# Altium PCB RF-car.PcbDoc
Units mm, origin at the board's own origin, x right, y up, seen from the top; angles counter-clockwise.
Board outline 151 x 86.38 mm, 2 copper layers (Top Layer, Bottom Layer); 71 components, 69 nets, 188 pads, 0 vias.
Unrouted connection lines stored in the file: 9.
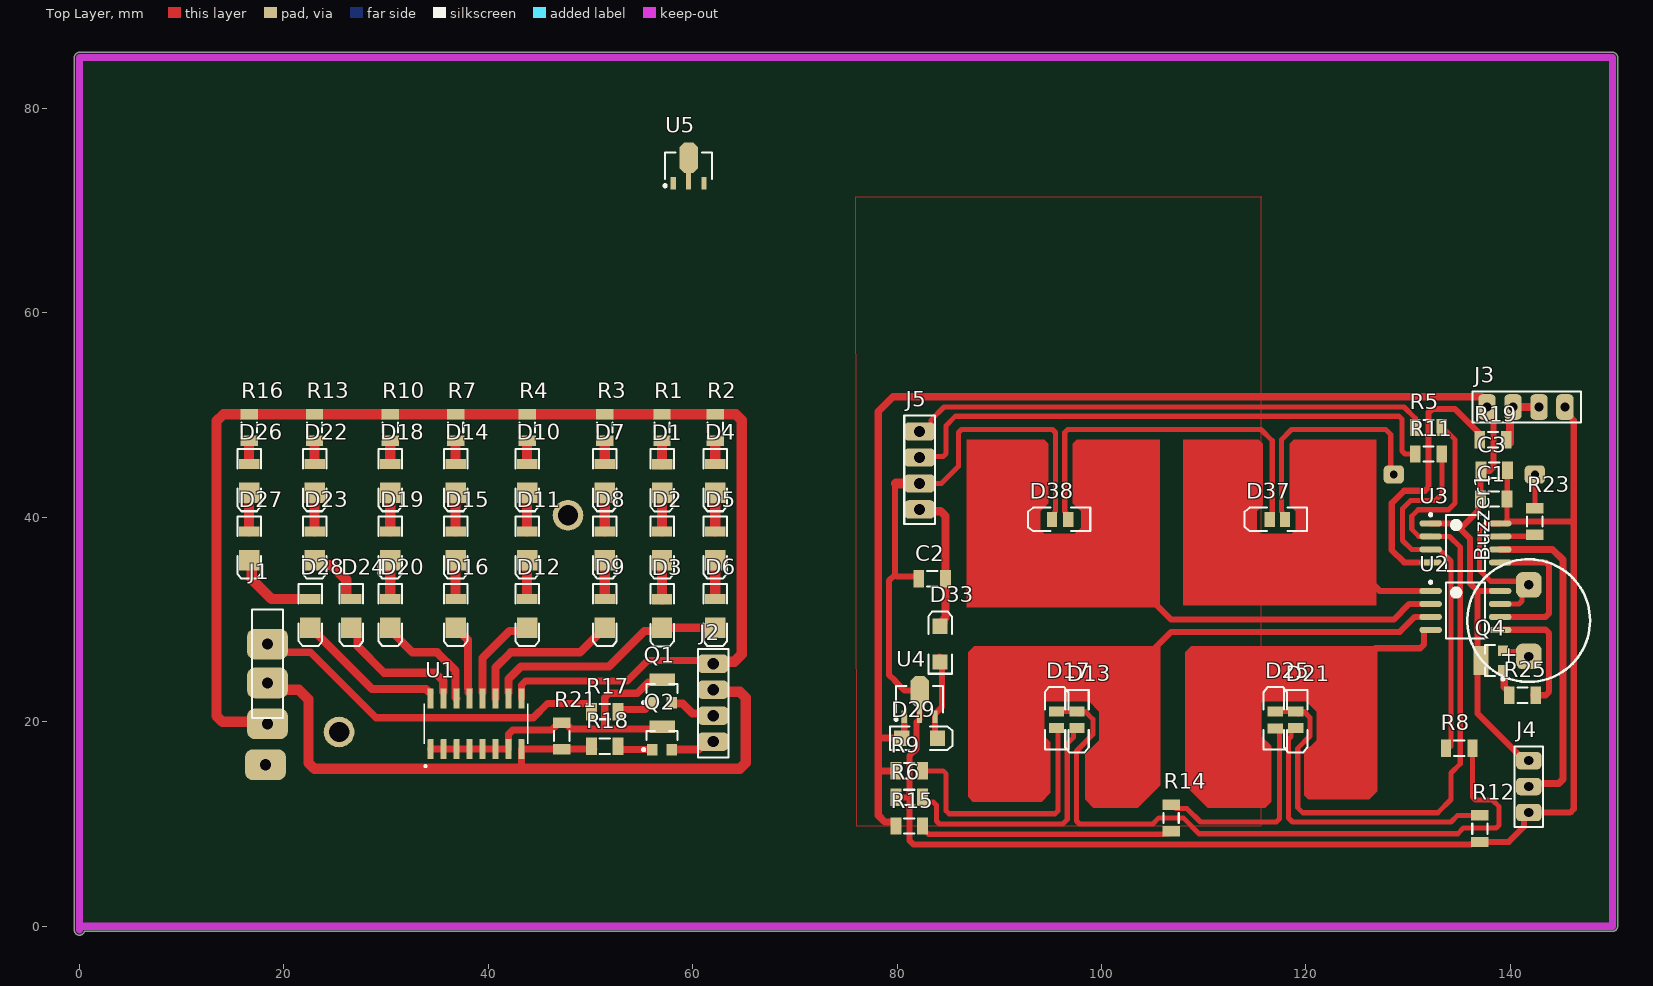
[diagram p0: Top Layer view]
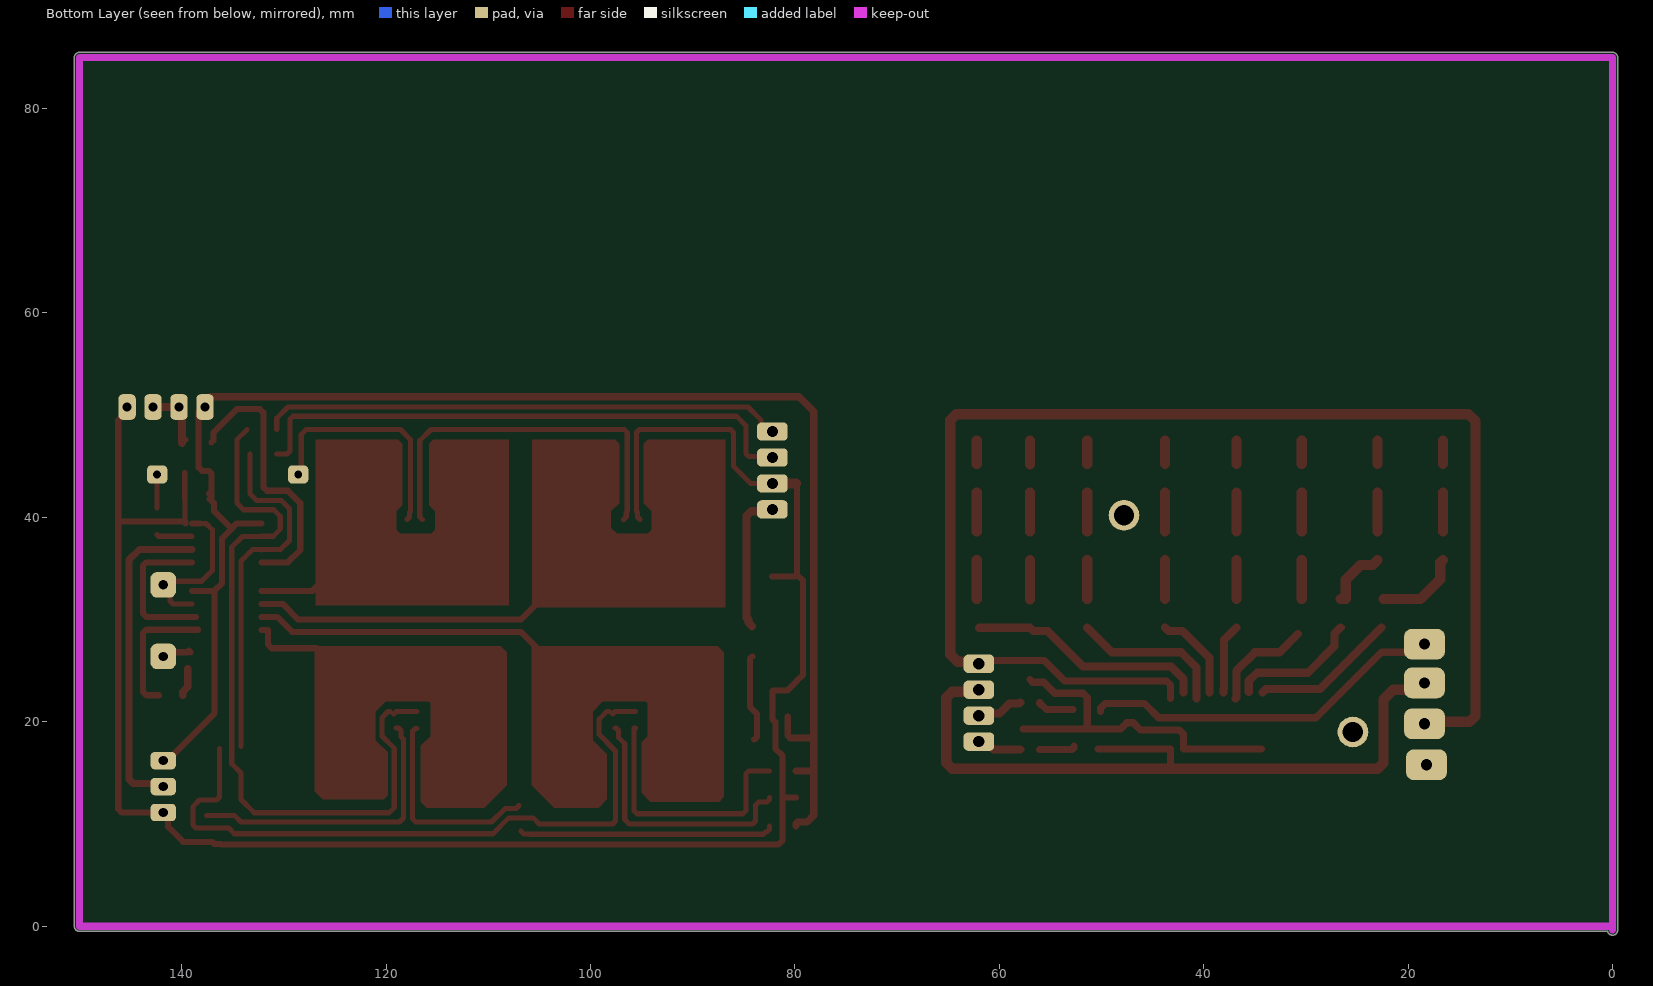
[diagram p1: Bottom Layer view, seen from below]

## Layer stack, top to bottom
Top Solder: solder mask 0.0102, Solder Resist, Dk 3.5
Top Layer: signal copper 0.0356
Dielectric 1: dielectric 0.32, FR-4, Dk 4.8
Bottom Layer: signal copper 0.0356
Bottom Solder: solder mask 0.0102, Solder Resist, Dk 3.5

## Board outline
-0.5,-0.381 -0.5,85 cw(c0,85) 0,85.5 150,85.5 cw(c150,85) 150.5,85 150.5,0 cw(c150,0) 150,-0.5 0.486,-0.5 cw(c0,-0.381)

## Design rules (kind name [scope] priority, off if disabled: settings)
Clearance Clearance_1 [InPolygon] p1: gap=1 ignorepadtopadclearanceinfootprint=FALSE
Clearance [All] p2: gap=0.4 ignorepadtopadclearanceinfootprint=FALSE
PolygonConnect [All] p1: connectstyle=Relief reliefconductorwidth=0.254 reliefentries=4 polygonreliefangle="90 Angle" airgapwidth=0.254
RoutingLayers [All] p1: top layer_v5=FALSE bottom layer_v5=TRUE
RoutingVias [All] p1: holewidth=0.711 width=2.5 viastyle="Through Hole" minholewidth=0.711 minwidth=1.27 maxholewidth=0.711 maxwidth=2
SolderMaskExpansion [All] p1: expansion=0.102 istentingtop=FALSE
SupplyNets "Schematic Supply Nets_1" [InNet('vcc')] p1: voltage=0.000
SupplyNets "Schematic Supply Nets" [InNet('GND')] p2: voltage=0.000
Width [All] p1: maxlimit=3 minlimit=0.4 preferedwidth=1
29 further rules are at their usual default settings.

## Components (designator, comment, footprint, x,y, rotation, side; value= is the part's Value field where it differs from the comment)
Buzzer1 "Buzzer" BUZZER 141.8,29.9 r90 top
C1 "=Value" "CAP 1206" 138.4,41.8 r180 top
C2 "=Value" "CAP 1206" 83.4,34 r0 top
C3 "=Value" "CAP 1206" 138.4,44.6 r0 top
D1 "LED2" 3.2X1.6X1.1#1 57,43.777 r270 top
D2 "LED2" 3.2X1.6X1.1#1 57,37.2 r270 top
D3 "LED2" 3.2X1.6X1.1#1 57,30.577 r270 top
D4 "LED2" 3.2X1.6X1.1#1 62.2,43.8 r270 top
D5 "LED2" 3.2X1.6X1.1#1 62.2,37.2 r270 top
D6 "LED2" 3.2X1.6X1.1#1 62.2,30.6 r270 top
D7 "LED2" 3.2X1.6X1.1#1 51.4,43.8 r270 top
D8 "LED2" 3.2X1.6X1.1#1 51.4,37.2 r270 top
D9 "LED2" 3.2X1.6X1.1#1 51.4,30.6 r270 top
D10 "LED2" 3.2X1.6X1.1#1 43.8,43.8 r270 top
D11 "LED2" 3.2X1.6X1.1#1 43.8,37.2 r270 top
D12 "LED2" 3.2X1.6X1.1#1 43.8,30.6 r270 top
D13 "LED2" 3.2X1.6X1.1#2 97.6,20.2 r270 top
D14 "LED2" 3.2X1.6X1.1#1 36.8,43.8 r270 top
D15 "LED2" 3.2X1.6X1.1#1 36.8,37.2 r270 top
D16 "LED2" 3.2X1.6X1.1#1 36.8,30.6 r270 top
D17 "LED2" 3.2X1.6X1.1#2 95.6,20.2 r90 top
D18 "LED2" 3.2X1.6X1.1#1 30.4,43.8 r270 top
D19 "LED2" 3.2X1.6X1.1#1 30.4,37.2 r270 top
D20 "LED2" 3.2X1.6X1.1#1 30.4,30.6 r270 top
D21 "LED2" 3.2X1.6X1.1#2 119,20.2 r270 top
D22 "LED2" 3.2X1.6X1.1#1 23,43.8 r270 top
D23 "LED2" 3.2X1.6X1.1#1 23,37.2 r270 top
D24 "LED2" 3.2X1.6X1.1#1 26.6,30.6 r270 top
D25 "LED2" 3.2X1.6X1.1#3 117,20.2 r90 top
D26 "LED2" 3.2X1.6X1.1#1 16.6,43.8 r270 top
D27 "LED2" 3.2X1.6X1.1#1 16.6,37.2 r270 top
D28 "LED2" 3.2X1.6X1.1#1 22.6,30.6 r270 top
D29 "D Tunnel1" 3.2X1.6X1.1#4 82.2,18.4 r0 top
D33 "D Tunnel1" 3.2X1.6X1.1#4 84.2,27.6 r90 top
D37 "LED2" 3.2X1.6X1.1#5 117.2,39.8 r180 top
D38 "LED2" 3.2X1.6X1.1#6 96,39.8 r180 top
J1 "Header4X1" "HEADER 4X1"#1 18.4,21.8 r90 top
J2 "Header4X1" "HEADER 4X1"#2 62,25.68 r270 top
J3 "Header4X1" "HEADER 4X1"#3 137.72,50.8 r0 top
J4 "Header3X1" "HEADER 3X1" 141.8,16.2 r270 top
J5 "Header4X1" "HEADER 4X1"#2 82.2,40.78 r90 top
Q1 "PNP" SOT-23B_N 57,23 r90 top
Q2 "PNP" SOT-23B_N 57,18.4 r90 top
Q4 "QNPN" SOT-23B_L 138.2,26 r180 top
R1 "10K" "RES 1206 (3216X08L)"#1 57,48.8 r270 top
R2 "10K" "RES 1206 (3216X08L)"#1 62.2,48.8 r270 top
R3 "10K" "RES 1206 (3216X08L)"#1 51.4,48.8 r270 top
R4 "10K" "RES 1206 (3216X08L)"#1 43.8,48.8 r270 top
R5 "10K" "RES 1206 (3216X08L)"#1 132,48.8 r180 top
R6 "10K" "RES 1206 (3216X08L)"#1 81.2,12.6 r180 top
R7 "10K" "RES 1206 (3216X08L)"#1 36.8,48.8 r270 top
R8 "10K" "RES 1206 (3216X08L)"#2 135,17.4 r180 top
R9 "10K" "RES 1206 (3216X08L)"#1 81.2,15.2 r180 top
R10 "10K" "RES 1206 (3216X08L)"#1 30.4,48.8 r270 top
R11 "10K" "RES 1206 (3216X08L)"#1 132,46.2 r180 top
R12 "10K" "RES 1206 (3216X08L)"#2 137.025,9.551 r270 top
R13 "10K" "RES 1206 (3216X08L)"#1 23,48.8 r270 top
R14 "10K" "RES 1206 (3216X08L)"#1 106.805,10.6 r270 top
R15 "10K" "RES 1206 (3216X08L)"#1 81.2,9.8 r180 top
R16 "10K" "RES 1206 (3216X08L)"#1 16.6,48.8 r270 top
R17 "10K" "RES 1206 (3216X08L)"#1 51.4,21 r0 top
R18 "10K" "RES 1206 (3216X08L)"#1 51.4,17.6 r0 top
R19 "10K" "RES 1206 (3216X08L)"#1 138.299,47.6 r0 top
R21 "10K" "RES 1206 (3216X08L)"#1 47.2,18.6 r90 top
R23 "10K" "RES 1206 (3216X08L)"#1 142.4,39.6 r90 top
R25 "10K" "RES 1206 (3216X08L)"#1 141.2,22.6 r180 top
U1 "ULN2003ADRG4" SOIC127P600X175-16N 38.8,19.8 r90 top
U2 "ATtiny15L-1SC" 8S2_N 135.6,30.895 r0 top
U3 "ATtiny15L-1SC" 8S2_N 135.6,37.505 r0 top
U4 "LM1117MP-3.3" SOT89L 82.2,22.2 r90 top
U5 "LM1117MP-3.3" SOT89L 59.6,74.4 r90 top

## Footprints (in the part's own frame and the unit in brackets; to place one, negate y for a bottom-side part, rotate by r counter-clockwise, add the part's x,y. Pads: shape width x height; smd on the part's side, far side on the other; paste and mask are expansions set on the pad)
3.2X1.6X1.1#1 [mm] "SMT LED; 2 Flat Leads"
  rect 1x2 smd: 1(-1.423,0)
  rect 2x2 smd: 2(1.377,0)
  silkscreen extent -2.9,-1.15 3.2,1.15
3.2X1.6X1.1#2 [mm] "SMT LED; 2 Flat Leads"
  rect 1x1.5 smd: 1(-0.8,0) 2(0.8,0)
  silkscreen extent -2.9,-1.15 3.2,1.15
3.2X1.6X1.1#3 [mm] "SMT LED; 2 Flat Leads"
  rect 1x1.5 smd: 1(-0.85,0) 2(0.8,0)
  silkscreen extent -2.9,-1.15 3.2,1.15
3.2X1.6X1.1#4 [mm] "SMT LED; 2 Flat Leads"
  rect 1.5x1.5 smd: 1(-1.75,0) 2(1.75,0)
  silkscreen extent -2.9,-1.15 3.2,1.15
3.2X1.6X1.1#5 [mm] "SMT LED; 2 Flat Leads"
  rect 1x1.5 smd: 1(-0.75,0) 2(0.75,0)
  silkscreen extent -2.9,-1.15 3.2,1.15
3.2X1.6X1.1#6 [mm] "SMT LED; 2 Flat Leads"
  rect 1x1.5 smd: 1(-0.75,0) 2(0.85,0)
  silkscreen extent -2.9,-1.15 3.2,1.15
8S2_N [mm] "SOP, 8-Leads, Body 5.3x5.3mm, Pitch 1.27mm, IPC Medium Density"
  oval 2.2x0.6 smd: 1(-3.4,1.905) 2(-3.4,0.635) 3(-3.4,-0.635) 4(-3.4,-1.905) 5(3.4,-1.905) 6(3.4,-0.635) 7(3.4,0.635) 8(3.4,1.905)
  silkscreen extent -3.52,-2.75 1.9,2.88, body extent -2.73,-2.75 2.73,2.75, height 2.16
BUZZER [mm] "BUZZER"
  rrect50% 2.5x2.5 hole 0.9: 1(-3.5,0) 2(3.5,0)
  silkscreen extent -6,-6 6,6
"CAP 1206" [mm]
  rect 1.05x1.7 smd: 1(-1.27,0) 2(1.326,0)
  silkscreen extent -0.47,-0.75 0.53,0.75, body extent -1.49,-0.77 1.55,0.75, height 0.75
"HEADER 3X1" [mm]
  rrect50% 1.7x2.5 hole 0.9: 1(0,0) 2(2.54,0) 3(5.08,0)
  silkscreen extent -1.4,-1.4 6.48,1.4, body extent -1.24,-1.27 6.38,1.27, height 8.38
"HEADER 4X1"#1 [mm]
  rrect50% 3x4 hole 1.1: 1(-2,0) 2(2,0) 3(5.8,0) 4(-6,0.2)
  silkscreen extent -1.43,-1.5 9.18,1.5, body extent -1.19,-1.22 8.97,1.32, height 8.38
"HEADER 4X1"#2 [mm]
  rrect50% 1.8x3 hole 1.1: 1(0,0) 2(2.54,0) 3(5.08,0) 4(7.62,0)
  silkscreen extent -1.43,-1.5 9.18,1.5, body extent -1.19,-1.22 8.97,1.32, height 8.38
"HEADER 4X1"#3 [mm]
  rrect50% 1.7x2.5 hole 0.9: 1(0,0) 2(2.54,0) 3(5.08,0) 4(7.62,0)
  silkscreen extent -1.43,-1.5 9.18,1.5, body extent -1.19,-1.22 8.97,1.32, height 8.38
"RES 1206 (3216X08L)"#1 [mm] "Chip Resistor, 2-Leads, Body 3.2x1.6mm, IPC High Density _ (0.125 W)"
  rect 1.05x1.7 smd: 1(-1.295,0) 2(1.301,0)
  silkscreen extent -0.5,-0.75 0.5,0.75, body extent -1.52,-0.76 1.53,0.76, height 0.6
"RES 1206 (3216X08L)"#2 [mm] "Chip Resistor, 2-Leads, Body 3.2x1.6mm, IPC High Density _ (0.125 W)"
  rect 1x1.7 smd: 1(-1.295,0) 2(1.301,0)
  silkscreen extent -0.5,-0.75 0.5,0.75, body extent -1.52,-0.76 1.53,0.76, height 0.6
SOIC127P600X175-16N [mm]
  rrect25% 1.97x0.6 smd: 1(-2.475,4.445) 2(-2.475,3.175) 3(-2.475,1.905) 4(-2.475,0.635) 5(-2.475,-0.635) 6(-2.475,-1.905) 7(-2.475,-3.175) 8(-2.475,-4.445) 9(2.475,-4.445) 10(2.475,-3.175) 11(2.475,-1.905) 12(2.475,-0.635) 13(2.475,0.635) 14(2.475,1.905) 15(2.475,3.175) 16(2.475,4.445)
  silkscreen extent -4.24,-5.06 1.95,5.06
SOT89L [mm] "SOT89, 3-Leads, Body 4.5x2.4 mm, Pitch 1.5mm, Lead Span 4.1mm, IPC High Density"
  rect 1.2x0.5 smd: 1(-1.7,1.5) 3(-1.7,-1.5)
  rect 1.6x0.5 smd: 2(-1.5,0)
  oct 3x1.8 smd: 2(0.8,0)
  silkscreen extent -2.07,-2.3 1.3,2.42, body extent -1.3,-2.3 1.3,2.3, height 1.6
SOT-23B_L [mm] "SOT23, 3-Leads, Body 2.9x1.3mm, Pitch 0.95mm, Lead Span 2.4mm, IPC High Density"
  rect 1x1 smd: 1(-1.075,0.95) 2(-1.075,-0.95)
  rect 1.5x2.8 smd: 3(1.075,0)
  silkscreen extent -1.2,-1.5 0.7,1.92, body extent -0.7,-1.5 0.7,1.5, height 1.14
SOT-23B_N [mm] "SOT23, 3-Leads, Body 2.9x1.3mm, Pitch 0.95mm, Lead Span 2.4mm, IPC Medium Density"
  rect 1.15x1 smd: 1(-1.125,0.95) 2(-1.125,-0.95)
  rect 1.2x2.5 smd: 3(1.125,0)
  silkscreen extent -1.25,-1.5 0.7,1.92, body extent -0.7,-1.5 0.7,1.5, height 1.14

## Part data
C1 C2 C3: library part Capacitor, "Capacitor"
D1 D2 D3 D4 D5 D6 D7 D8 D9 D10 D11 D12 D13 D14 D15 D16 D17 D18 D19 D20 D21 D22 D23 D24 D25 D26 D27 D28 D37 D38: "Typical RED, GREEN, YELLOW, AMBER GaAs LED", LatestRevisionDate=17-Jul-2002, LatestRevisionNote="Re-released for DXP Platform.", PackageDescription="SM LED; 2 Flat Leads", PackageReference=3.2X1.6X1.1, PackageVersion=Feb-2002, Published=8-Jun-2000, Publisher="Altium Limited", Simulation ModelName=LED2, Simulation PortMap=(1:1),(2:2)
D29 D33: "Tunnel Diode - RLC Model", LatestRevisionDate=17-Jul-2002, LatestRevisionNote="Re-released for DXP Platform.", PackageDescription="SM LED; 2 Flat Leads", PackageReference=3.2X1.6X1.1, PackageVersion=Feb-2002, Published=8-Jun-2000, Publisher="Altium Limited", Simulation ModelName=DTUNNEL1, Simulation PortMap=(1:1),(2:2)
Q1 Q2: "PNP Bipolar Transistor", LatestRevisionDate=29-May-2009, LatestRevisionNote="IPC-7351 Footprint Added.", PackageDescription="3-Pin SOT-23 Package 0.95 mm Pitch, 2.4 mm Lead Span", PackageReference=SOT-23B, PackageVersion=Aug-1999, Published=8-Jun-2000, Publisher="Altium Limited", Simulation ModelName=PNP, Simulation PortMap=(1:1),(2:2),(3:3)
Q4: "NPN Bipolar Transistor", LatestRevisionDate=29-May-2009, LatestRevisionNote="IPC-7351 Footprint Added.", PackageDescription="3-Pin SOT-23 Package 0.95 mm Pitch, 2.4 mm Lead Span", PackageReference=SOT-23B, PackageVersion=Aug-1999, Published=8-Jun-2000, Publisher="Altium Limited", Simulation ModelName=QNPN, Simulation PortMap=(1:1),(2:2),(3:3)
R1 R2 R3 R4 R5 R6 R7 R8 R9 R10 R11 R12 R13 R14 R15 R16 R17 R18 R19 R21 R23 R25: library part Resistor, "Resistor", Power="1/4 W", Tolerance=5%, Simulation ModelName="Model Name", Simulation PortMap=(1:1),(2:2)
U1: "50-V, 7-ch darlington transistor array, -20C to 70C 16-SOIC -40 to 70", Package=None, Availability=Unavailable, MP=ULN2003ADRG4, Price=None
U2 U3: "8-Bit AVR Microcontroller with 1K Byte of Flash Memory", Supplier Part Number 1=ATTINY15L-1SC-ND, ComponentLink1Description=Datasheet, ComponentLink1URL=http://www.atmel.com/dyn/resources/prod_documents/doc1187.pdf, ComponentLink2Description="Atmel.com Home", ComponentLink2URL=http://www.atmel.com, DatasheetVersion=1187E-AVR-06/02, LatestRevisionDate=16-Oct-2006, LatestRevisionNote="IPC-7351 Footprint Added.", PackageDescription="8-Lead, 0.208\" Body, Plastic Small Outline Package (EIAJ)", PackageReference=8S2, PackageVersion="revF, Apr-2008", Published=17-Sep-2003, Publisher="Altium Limited", Supplier 1=Digi-Key, Supplier 2=Mouser, Supplier Part Number 2=556-ATTINY15L1SC
U4 U5: "800mA Low-Dropout Linear Regulator", DigiKeyPartNumber=LM1117MP-3.3CT-ND, Manufacturer="National Semiconductor", PackageTopMarking=XYTT*N05A, PowerWise=N, Code_IPC=SOT223-4, Code_JEDEC=TO-261-AA, ComponentLink1Description="LM1117 Datasheet", ComponentLink1URL=http://www.national.com/ds/LM/LM1117.pdf, ComponentLink2Description="LM1117 Web Page", ComponentLink2URL=http://www.national.com/pf/LM/LM1117.html, ComponentLink3Description="MP04A Package Page", ComponentLink3URL=http://www.national.com/packaging/folders/mp04a.html, CompType="LDO IC", DatasheetVersion=Apr-2006, PackageDescription="Molded SOT-223, 6.50 x 3.56 x 1.6mm Body, 4 Lead, 2.3mm Pitch", PackageReference=MP04A, PackageVersion="revB, Apr-2003", PartNumber=LM1117MP-3.3, PinCount=4, Published=4-Dec-2008, Publisher="Altium Limited", RoHS=O
Buzzer1: ComponentLinkURL=www.picpars.com, Designer="Seyed Mohsen Ghasemain"

## Free pads (board coordinates)
  rrect50% 2x1.8 hole 0.762: 12(128.6,44.2) 13(142.4,44.2)
  round 3 hole 2: 14(47.8,40.2) 15(25.4,19)

## Nets (pads, with @x,y where several pads share a name; then routed paths per layer and width w, separated by ;. In a path a pad name is that pad's centre, name@x,y a point inside that pad or via, vN(x,y) a via of type N, cw(c..) or ccw(c..) an arc to the next point about the centre after c; other vN are vias at no path point)
bizer: R25.1 U2.5 | length 13
  Top Layer w0.6: U2.5@138.4,29 143.449,29 143.8,28.649 143.8,22.951 143.449,22.6 R25.1 R25.1@142.211,22.6
data: U2.6 U3.5 | length 14.9
  Top Layer w0.6: U2.6@138.6,30.26 U2.6 143.449,30.26 143.8,30.611 143.8,35.249 143.449,35.6 U3.5
DATA_IN: R19.1 U3.4 | length 27.5
  Top Layer w0.6: U3.4 129.6,35.6 128.4,36.8 128.4,41.4 129.6,42.6 131.649,42.6 132,42.951 132,50.249 132.351,50.6 134.6,50.6 136.88,48.32 136.88,47.55 R19.1@137.091,47.339
DATA_OUT: J4.2 U3.6 | length 32
  Top Layer w0.7: U3.6 144.13,36.87 145.15,35.85 145.15,14.378 144.74,13.968 J4.2@141.373,13.968
GND: Buzzer1.2 C1.1 C2.1 C3.2 D38.2 J1.2 J2.2 J3.4 J4.3 J5.2 R6.2 R12.2 R18.1 R21.1 U1.8 U2.7 U3.8 U4.2 | length 277
  Top Layer w0.5: J5.2 84.32,43.32 86,45 86,48.307 86.293,48.6 95.2,48.6 95.5,48.3 95.5,40.593 95.4,40.493 95.4,40.05 D38.2 ; U3.8@138.21,39.41 137.61,39.41 137,38.8 137,34.8 138.05,33.75 140.829,33.75 141.554,33.025 141.143,32.613 141.143,31.823 140.85,31.53 U2.7 ; U3.8@139.624,39.41 139.67,39.456 C1.1 139.698,41.828 139.698,44.372 C3.2@139.726,44.4
  Top Layer w0.6: 79.8,24 79.2,24.6 79.2,33.8 79.8,34.4 ; 79.829,23.971 80.751,23.049 82.151,23.049 82.2,23 82.2,20.7 82.2,20.25 81.9,19.95 81.9,17.36 81.2,16.66 81.2,12.6 ; 79.88,43.32 79.8,43.24 79.8,34.4 ; R6.2 81.2,12.6 ; C2.1@82.225,34.2 80,34.2 79.8,34.4 ; U3.8@138.21,39.41 U3.8 ; U3.8@139.624,39.41 139.624,39.6 146.2,39.6 ; J3.4 145.34,50.359 146.2,49.499 146.2,39.6 ; 81.2,12.6 81.2,8.4 81.6,8 136.123,8 136.173,8.05 136.825,8.05 R12.2 139.85,8.25 141.321,9.721 141.321,10.641 J4.3 145.849,11.12 146.2,11.471 146.2,39.6
  Top Layer w0.7: 43.245,15.4 U1.8 R18.1@50.335,17.325
  Top Layer w1: J1.2@17.4,23.8 18.07,23.13 21.47,23.13 22.4,22.2 22.4,15.986 22.986,15.4 43.245,15.4 64.6,15.4 65.2,16 65.2,22.359 64.614,22.945 62.966,22.945 J2.2@62.8,23.112 ; 79.88,43.32 J5.2
l1: D3.2 D6.2 U1.10 | length 23.4
  Top Layer w0.8: U1.10@41.975,22.875 41.975,24.175 43.2,25.4 51.8,25.4 55.269,28.869 56.669,28.869 D3.2 D6.2@62,29.2
l2: D9.2 U1.11 | length 15.3
  Top Layer w0.8: U1.11 40.705,25.305 42.2,26.8 48.977,26.8 D9.2
l3: D12.2 U1.12 | length 9
  Top Layer w0.8: U1.12@39.435,22.875 39.435,26.235 42.069,28.869 43.446,28.869 D12.2
l4: D16.2 U1.13 | length 6.9
  Top Layer w0.8: D16.2 38,28.023 38,23.257 38.065,23.192 U1.13@38.065,22.86
l5: D20.2 U1.14 | length 10.3
  Top Layer w0.8: D20.2@30.8,28.6 32.6,26.8 35,26.8 36.8,25 36.8,22.37 U1.14
l6: D24.2 U1.15 | length 13
  Top Layer w0.8: D24.2 27.2,28.623 27.2,27.4 29.8,24.8 34.8,24.8 35.6,24 U1.15@35.6,22.922
l7: D28.2 U1.16 | length 14.3
  Top Layer w0.8: D28.2 23.2,28.623 28.623,23.2 33.915,23.2 U1.16@34.255,22.86
led: R23.1 U3.7 | length 3.5
  Top Layer w0.5: U3.7 139.019,38.159 142.255,38.159 R23.1
NetBuzzer1_1: Buzzer1.1 Q4.2 | length 3
  Top Layer w0.6: Q4.2@139.124,26.8 139.125,26.8 Q4.2 139.425,26.8 141.4,26.8 Buzzer1.1
NetD1_1: D1.1 R1.2 | length 2.3
  Top Layer w1: D1.1 R1.2
NetD1_2: D1.2 D2.1 | length 3.8
  Top Layer w1: D2.1 D1.2
NetD2_2: D2.2 D3.1 | length 3.8
  Top Layer w1: D3.1 D2.2
NetD4_1: D4.1 R2.2 | length 2.3
  Top Layer w1: D4.1 R2.2
NetD4_2: D4.2 D5.1 | length 3.8
  Top Layer w1: D5.1 D4.2
NetD5_2: D5.2 D6.1 | length 3.8
  Top Layer w1: D6.1 D5.2
NetD7_1: D7.1 R3.2 | length 2.3
  Top Layer w1: D7.1 R3.2
NetD7_2: D7.2 D8.1 | length 3.8
  Top Layer w1: D8.1 D7.2
NetD8_2: D8.2 D9.1 | length 3.8
  Top Layer w1: D9.1 D8.2
NetD10_1: D10.1 R4.2 | length 2.3
  Top Layer w1: D10.1 R4.2
NetD10_2: D10.2 D11.1 | length 3.8
  Top Layer w1: D11.1 D10.2
NetD11_2: D11.2 D12.1 | length 3.8
  Top Layer w1: D12.1 D11.2
NetD13_1: D13.1 D17.2 R5.1 R8.1 | length 110.7
  Top Layer w0.5: D17.2 D13.1 D13.1@97.85,20.75 ; D13.1@98.2,21 98.4,21 99.15,20.25 99.15,18.75 97.55,17.15 97.55,10.293 97.843,10 105.011,10 105.611,10.6 108,10.6 109.551,9.049 134.849,9.049 135.4,9.6 138.6,9.6 138.908,9.908 138.908,11.692 138.255,12.345 136.588,12.345 136.295,12.638 R8.1 ; R5.1@133.591,48.609 134.6,47.6 134.6,41.4 133.95,40.75 130.993,40.75 130.35,40.107 130.35,38.85 131.041,38.159 132.181,38.159 132.2,38.14 134.05,38.14 135.1,37.09 135.1,15.9 134.2,15 134.2,12.4
NetD13_2: D13.2 R6.1 | length 25.8
  Top Layer w0.5: R6.1 82.495,12.409 82.77,12.134 83.573,12.134 83.866,11.842 83.866,10.293 84.158,10 96.2,10 96.65,10.45 96.65,17.85 97.245,18.445 97.245,19.15 97.495,19.4 D13.2
NetD14_1: D14.1 R7.2 | length 2.3
  Top Layer w1: D14.1 R7.2
NetD14_2: D14.2 D15.1 | length 3.8
  Top Layer w1: D15.1 D14.2
NetD15_2: D15.2 D16.1 | length 3.8
  Top Layer w1: D16.1 D15.2
NetD17_1: D17.1 R9.1 | length 25.6
  Top Layer w0.5: R9.1 84.507,15.2 84.8,14.907 84.8,11.293 85.093,11 95.457,11 95.75,11.293 D17.1@95.75,19.25 ; D17.1 D17.1@95.75,19.25 ; D17.1@95.75,19.4 D17.1@95.75,19.25
NetD18_1: D18.1 R10.2 | length 2.3
  Top Layer w1: D18.1 R10.2
NetD18_2: D18.2 D19.1 | length 3.8
  Top Layer w1: D19.1 D18.2
NetD19_2: D19.2 D20.1 | length 3.8
  Top Layer w1: D20.1 D19.2
NetD21_2: D21.2 R12.1 | length 28.9
  Top Layer w0.5: D21.2 118.795,19.4 118.545,19.15 118.545,18.545 118.3,18.3 118.3,10.593 118.693,10.2 134.2,10.2 134.846,10.846 R12.1@137.563,10.846
NetD22_1: D22.1 R13.2 | length 2.3
  Top Layer w1: D22.1 R13.2
NetD22_2: D22.2 D23.1 | length 3.8
  Top Layer w1: D23.1 D22.2
NetD23_2: D23.2 D24.1 | length 6.3
  Top Layer w1: D23.2 23.472,35.351 24.649,35.351 26.1,33.9 26.1,32.023 D24.1
NetD25_1: D25.1 R14.1 | length 20.3
  Top Layer w0.5: R14.1@107,11.8 107.3,11.5 108.373,11.5 109.673,10.2 117.107,10.2 117.4,10.493 117.4,19.1 117.15,19.35 D25.1
NetD26_1: D26.1 R16.2 | length 2.3
  Top Layer w1: D26.1 R16.2
NetD26_2: D26.2 D27.1 | length 3.8
  Top Layer w1: D27.1 D26.2
NetD27_2: D27.2 D28.1 | length 8.3
  Top Layer w1: D27.2 16.849,35.574 16.849,33.951 18.777,32.023 D28.1@22.4,32.023
NetD29_2: D29.2 D33.1 U4.3 | length 8.4
  Top Layer w0.6: U4.3 83.7,18.55 D29.2@84,18.25 ; U4.3@83.7,20.75 84.4,21.45 84.4,26.15 D33.1@84.15,26.4
NetD30_1: 
NetD30_2: 
NetD31_2: 
NetD34_1: 
NetD34_2: 
NetD35_2: 
NetD37_1: D37.1 pad.12 pad.13 R23.2 | length 27.5
  Top Layer w0.5: D37.1 117.7,40.05 117.7,40.493 117.6,40.593 117.6,47.6 118.6,48.6 127.8,48.6 128.3,48.1 pad.12@128.3,43.8 ; pad.12@128.8,43.8 pad.12@128.3,43.8 ; R23.2 pad.13@142.4,44.04 ; pad.12@128.3,43.8 128.2,43.8 128.3,43.7 pad.12@128.3,43.8
NetD37_2: D37.2 D38.1 | length 37.3
  Top Layer w0.5: D38.1 96.5,40.05 96.5,40.493 96.4,40.593 96.4,48.307 96.693,48.6 115.6,48.6 116.7,47.5 116.7,40.593 116.7,40.05 D37.2
NetJ1_3: J1.3 R17.1 | length 35.8
  Top Layer w0.7: J1.3 19.2,26.8 22.6,26.8 29,20.4 44.4,20.4 45.8,21.8 49.63,21.8 50.105,21.325 R17.1
NetJ3_2: J3.2 J3.3 R19.2 | length 6.6
  Top Layer w0.5: R19.2 R19.2@139.875,47.875 ; J3.2@139.976,50.516 J3.2
  Top Layer w0.8: R19.2@139.976,47.275 J3.2@139.976,50.516 ; J3.2 J3.3
NetQ1_2: Q1.1 R17.2 | length 3.6
  Top Layer w0.7: R17.2@52.8,21.2 55.375,21.2 55.825,21.65 55.9,21.65 56.05,21.8 Q1.1
NetQ2_2: Q2.1 R18.2 | length 3.6
  Top Layer w0.7: R18.2 52.701,17.45 52.876,17.275 Q2.1
NetQ4_2: Q4.1 R25.2 | length 2.8
  Top Layer w0.7: Q4.1@139.4,25.2 139.4,23.424 139.899,22.925 R25.2
NetR14_2: R14.2 R15.1 | length 25
  Top Layer w0.5: R15.1 82.495,9.475 82.77,9.2 82.87,9.2 83.07,9 105.907,9 105.932,9.024 106.525,9.024 R14.2@106.8,9.299
o1: J5.4 R5.2 | length 51.3
  Top Layer w0.5: J5.4 82.664,48.4 83.299,49.035 83.299,49.499 84.6,50.8 129.6,50.8 130.699,49.701 R5.2 R5.2@130.699,48.6
o2: J5.3 R11.2 | length 54.3
  Top Layer w0.5: J5.3@83.066,45.866 83.157,45.957 84.507,45.957 84.8,46.25 84.8,49 85.7,49.9 129.107,49.9 129.4,49.607 129.4,46.493 129.693,46.2 R11.2
oo1: D21.1 D25.2 J2.4 Q2.2 R11.1 U3.2 | length 67.4
  Top Layer w0.5: D25.2 D21.1 D21.1@119.25,20.75 ; D21.1@119.6,21 119.8,21 120.4,20.4 120.4,18.6 119.2,17.4 119.2,11.6 119.7,11.1 132.9,11.1 134.2,12.4 ; 129.45,40.85 129.45,37.75 130.349,36.851 132.173,36.851 132.2,36.824 132.227,36.851 133.046,36.851 133.347,36.55 133.394,36.55 134.2,35.743 134.2,17.6 ; 129.452,40.852 130.25,41.65 132.65,41.65 133.295,42.295 R11.1
  Top Layer w0.8: Q2.2 60.588,17.275 61.345,18.032 J2.4@61.399,18.032
oo2: J2.3 Q1.2 R8.2 U3.3 | length 4.6
  Top Layer w0.8: Q1.2 58.049,21.776 59.024,21.776 59.983,20.817 61.783,20.817 J2.3
ouln: Q1.3 Q2.3 R21.2 U1.1 U1.2 U1.3 U1.4 U1.5 U1.6 U1.7 | length 34.8
  Top Layer w0.7: U1.1 U1.2 U1.3 U1.4 U1.5 U1.6 U1.7 41.975,18.785 42.39,19.2 46.2,19.2 46.7,19.7 46.7,19.726 46.875,19.901 47.525,19.901 47.7,19.726 47.7,19.719 48.11,19.309 Q2.3@57.691,19.309 ; 51.4,19.4 51.4,22.39 51.81,22.8 54.574,22.8 55.649,23.875 56.75,23.875 Q1.3
p1: U2.1 | length 18.3
  Top Layer w0.6: 115.197,36 124,36 127.2,32.8 U2.1
p2: U2.2 | length 32.3
  Top Layer w0.6: 102.37,34.43 106.8,30 128.6,30 130.13,31.53 U2.2
p3: U2.3 | length 31.6
  Top Layer w0.6: 102.862,24.862 106.8,28.8 129.2,28.8 130.66,30.26 U2.3
p4: U2.4 | length 11.7
  Top Layer w0.6: 123.442,23.842 126.8,27.2 131.19,27.2 131.541,27.551 131.541,28.99 U2.4
vcc: C1.2 C3.1 D29.1 J1.1 J2.1 J3.1 J4.1 Q4.3 R1.1 R2.1 R3.1 R4.1 R7.1 R9.2 R10.1 R13.1 R15.2 R16.1 U1.9 U2.8 U3.1 U4.1 | length 285.2
  Top Layer w0.5: J4.1@140.908,16.692 141.308,16.692 J4.1
  Top Layer w0.6: D29.1@80.7,18.65 U4.1 ; U3.1 134.59,39.41 135.1,38.9 ; C1.2 137.074,42.153 137.074,44.269 137.355,44.55 137.996,44.55 138.348,44.901 J3.1@138.348,50.348 ; C1.2@137.102,41.947 137.249,41.8 136.849,41.4 136.849,40.649 135.1,38.9 ; C1.2@137.102,42.153 C1.2@137.299,42.35 ; U2.8 136.8,32.8 ; J4.1@140.908,16.692 136.8,20.8 136.8,26 136.8,32.8 ; 135.1,38.9 136.05,37.95 136.05,33.55 136.8,32.8
  Top Layer w0.7: U1.9 43.245,23.59 43.655,24 53.6,24 55.6,26 61.68,26 J2.1 ; 78.8,10.2 78.15,10.85 78.15,15.2 ; 79,10.2 79.724,10.2 79.899,10.025 R15.2 ; R9.2 78.15,15.2 ; D29.1 78.15,18.4 ; J3.1@137.2,51.8 79.6,51.8 78.15,50.35 78.15,18.4 ; 78.15,15.2 78.15,18.4
  Top Layer w1: J1.1@18.4,20 13.986,20 13.4,20.586 13.4,49.4 14.095,50.095 R13.1 35.8,50.095 R7.1 R4.1 R3.1 R1.1 R2.1 64.214,50.095 64.8,49.51 64.8,26.6 64.069,25.869 62.189,25.869 J2.1
vdd: C2.2 D33.2 J5.1 | length 13.3
  Top Layer w0.8: J5.1@82.665,40.8 82.861,40.604 84.257,40.604 84.726,40.135 C2.2 84.726,30.169 84.55,29.993 84.55,29.7 D33.2
pads on no net: J1.4 U5.1 U5.2 U5.3

## Polygon pours and split planes (outlines as drawn)
GND on Top Layer "NONET_L01_P024" (hatched 90Degree grid 0.5 track 0.2, shelved, pour order 24): 75.946,71.374 115.697,71.374 115.57,71.247 115.57,9.779 76.073,9.779

## Keep-outs
Keep-Out Layer:
  lines w0.7: 0,-0.381 0,85 150,85 150,0 0,0

## Other copper
Top Layer:
  region net p3: 105.75,27.4 87.55,27.4 86.95,26.8 86.95,12.65 87.4,12.2 94.15,12.2 95,13.05 95,18 94.4,18.6 94.4,21.8 94.6,22 98.8,22 99.8,21 99.8,18.2 98.4,16.8 98.4,12.4 99.2,11.6 103.55,11.6 105.75,13.8
  region net p4: 127,27 126.6,27.4 108.8,27.4 108.2,26.8 108.2,13.8 110.4,11.6 116,11.6 116.6,12.2 116.6,17.65 115.65,18.6 115.65,21.8 115.85,22 120.05,22 121.05,21 121.05,18.2 119.85,17 119.85,12.8 120.25,12.4 126.2,12.4 127,13.2 127,13.8
  region net p2: 105.7,47.6 97.6,47.6 97.2,47.2 97.2,41.4 98,40.6 98,39 97.4,38.4 94.4,38.4 94,38.8 94,40.6 94.8,41.4 94.8,47.2 94.4,47.6 86.8,47.6 86.8,31.2 105.7,31.2
  region net p1: 126.9,47.6 118.8,47.6 118.4,47.2 118.4,41.2 119,40.6 119,38.8 118.6,38.4 115.6,38.4 115.2,38.8 115.2,40.6 115.8,41.2 115.8,47.2 115.4,47.6 108,47.6 108,31.4 126.9,31.4

## Silkscreen, mask and mechanical layers (free items; w line width, h text height)
Bottom Solder:
  lines w0.2: 11.8,14.2 11.8,52 66.2,52 66.2,14.2 11.8,14.2 ; 77,7.2 147.6,7.2 147.6,52.6 77,52.6 77,7.2

## Text inside footprints (layer, text, board x,y; h text height)
Buzzer1: Top Overlay "+" at 140.53,25.639 h1.52 r90